# Altium PCB PCB2.PcbDoc
Units mm, origin at the board's own origin, x right, y up, seen from the top; angles counter-clockwise.
Board outline 152.4 x 101.6 mm, 2 copper layers (Top Layer, Bottom Layer); 112 components, 88 nets, 447 pads, 143 vias.
Unrouted connection lines stored in the file: 3.
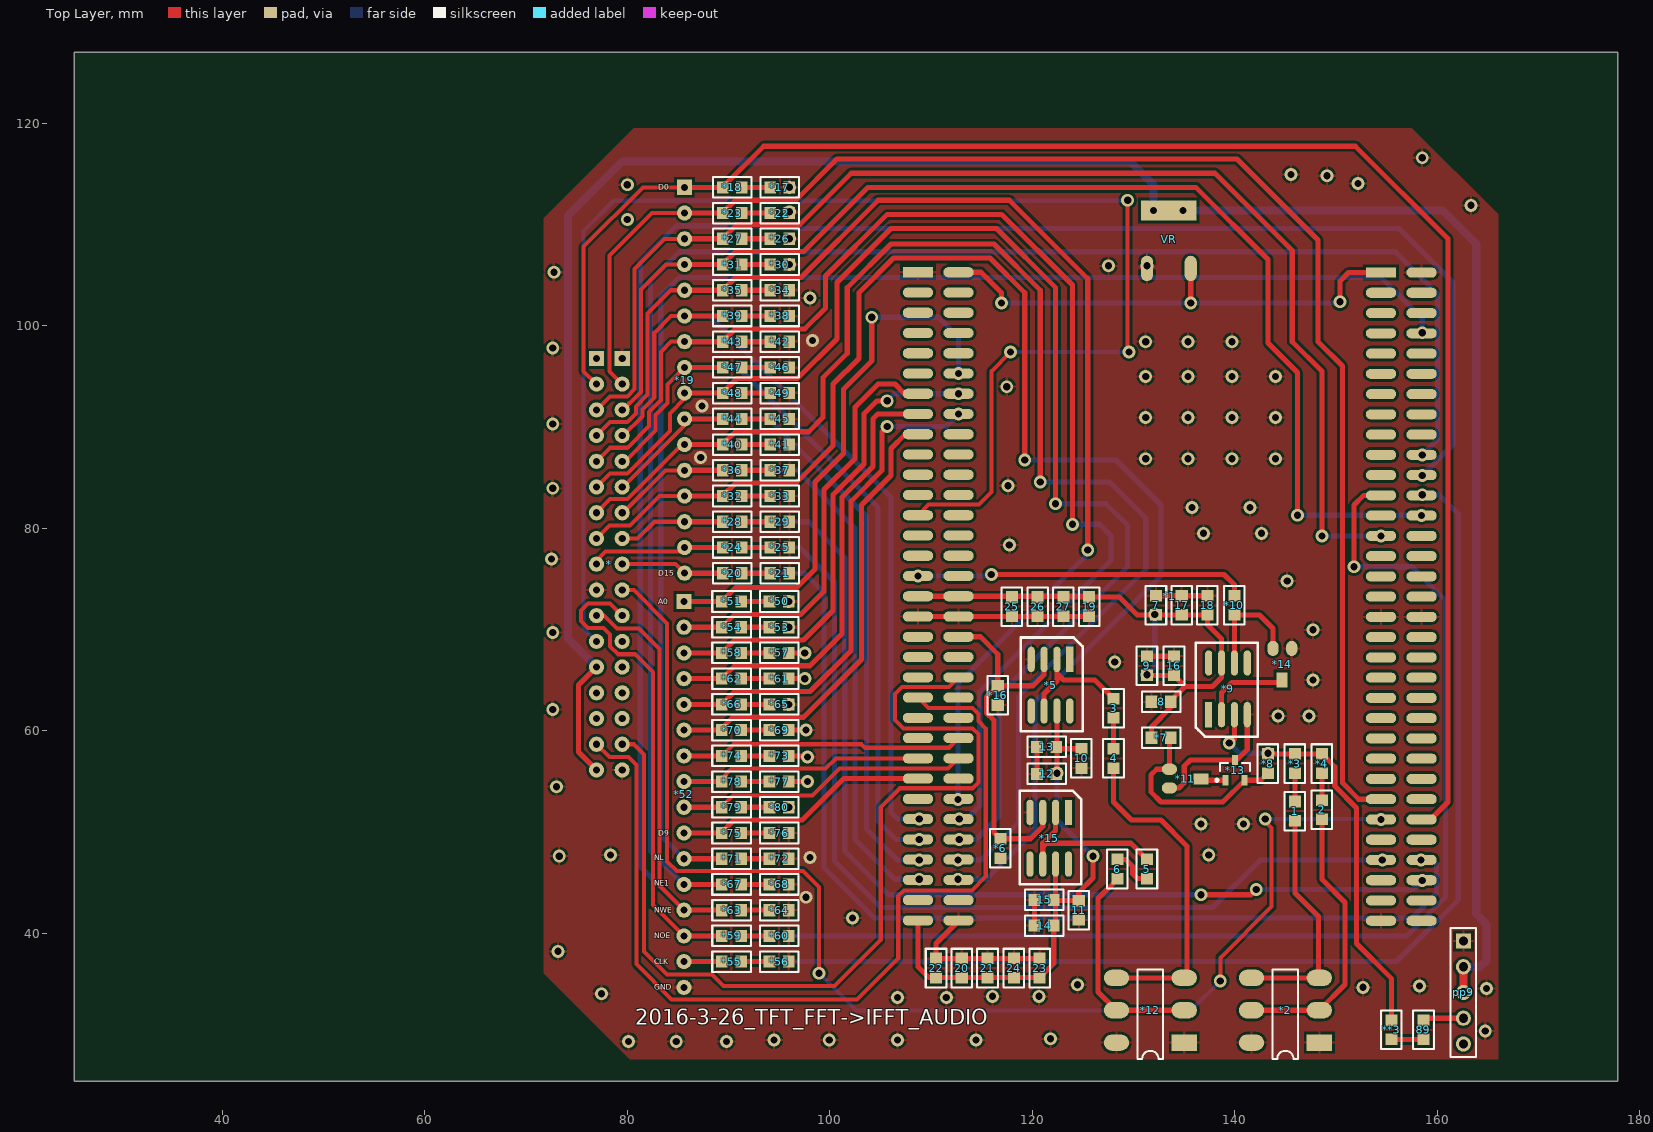
[diagram p0: Top Layer view]
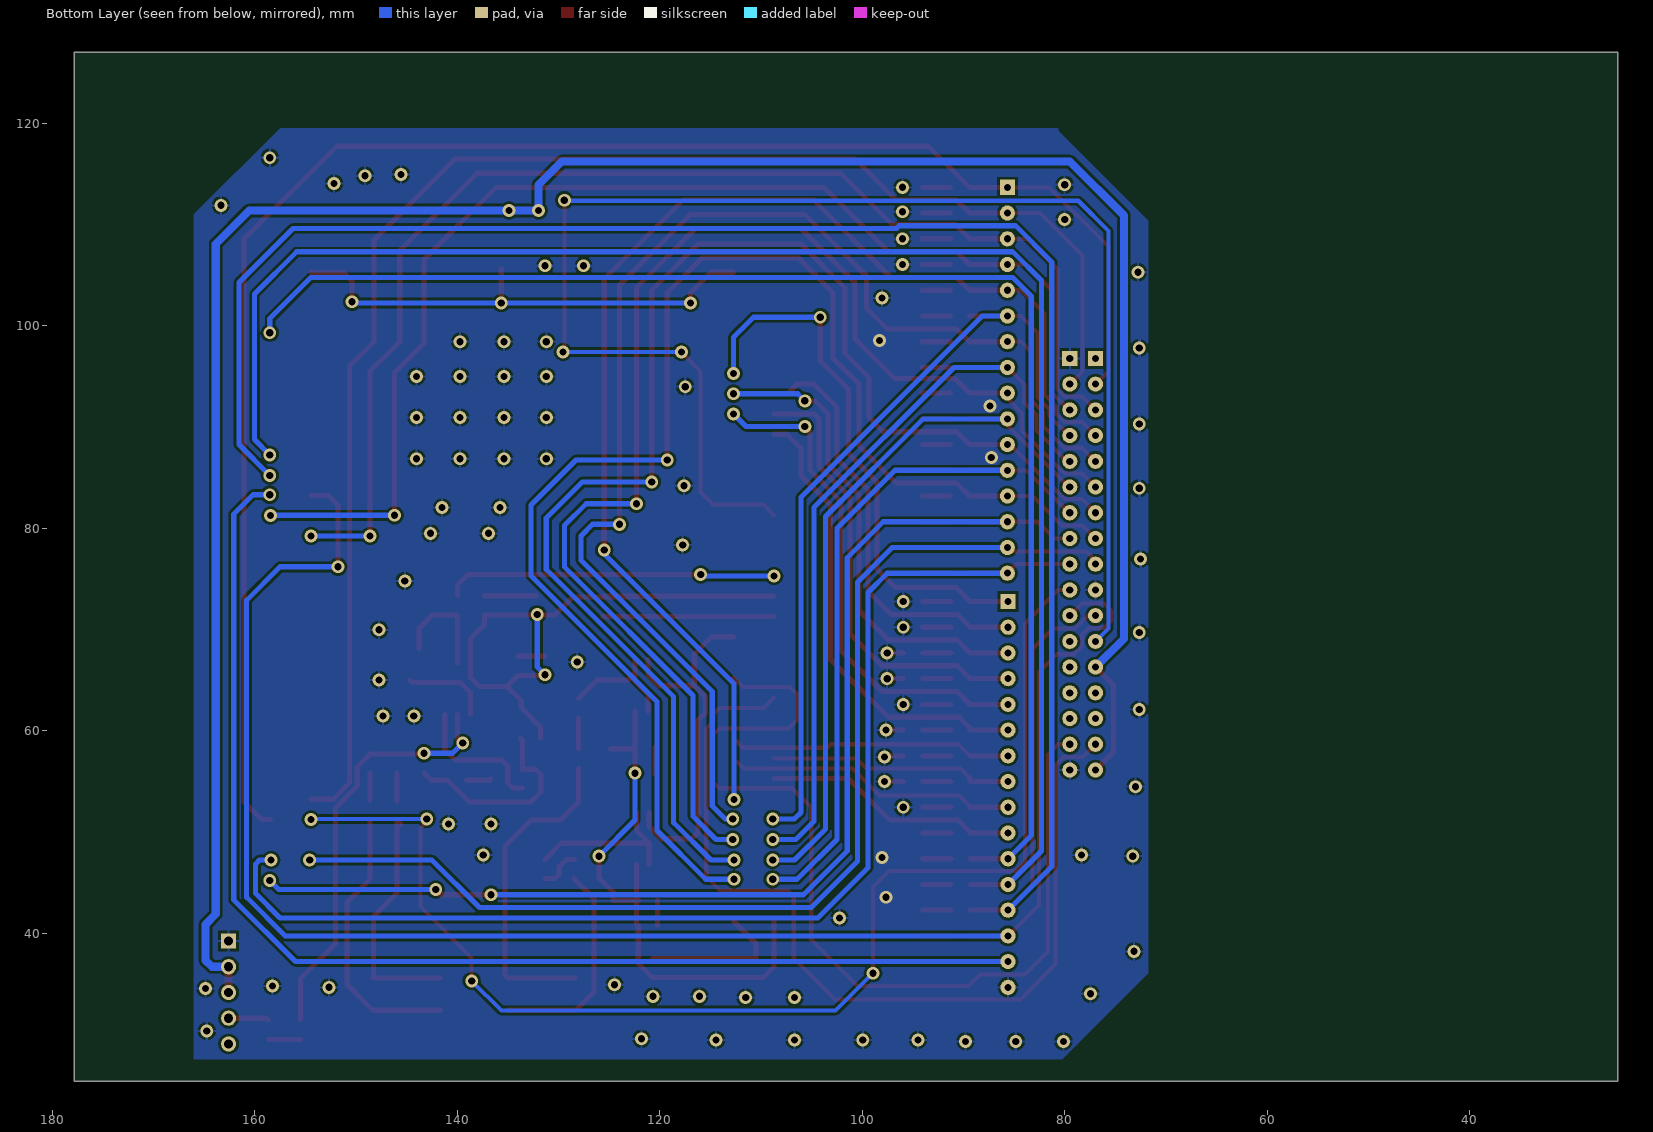
[diagram p1: Bottom Layer view, seen from below]

## Layer stack, top to bottom
Top Solder: solder mask 0.0102, Solder Resist, Dk 3.5
Top Layer: signal copper 0.0356
Dielectric 1: dielectric 0.32, FR-4, Dk 4.8
Bottom Layer: signal copper 0.0356
Bottom Solder: solder mask 0.0102, Solder Resist, Dk 3.5

## Board outline
25.4,25.4 177.8,25.4 177.8,127 25.4,127

## Design rules (kind name [scope] priority, off if disabled: settings)
Clearance [All] p1: gap=0.254
ComponentClearance [All] p1 off: gap=0.254 collisioncheckmode=3 verticalgap=0.254 showdistances=FALSE
PolygonConnect [All] p1: connectstyle=Relief reliefconductorwidth=0.254 reliefentries=4 polygonreliefangle="90 Angle" airgapwidth=0.254
RoutingVias [All] p1: holewidth=0.711 width=1.27 viastyle="Through Hole" minholewidth=0.711 minwidth=1.27 maxholewidth=0.711 maxwidth=1.27
SolderMaskExpansion [All] p1: expansion=0.102
Width [All] p1: maxlimit=0.8 minlimit=0.4 preferedwidth=0.8
29 further rules are at their usual default settings.

## Components (designator, comment, footprint, x,y, rotation, side; value= is the part's Value field where it differs from the comment)
1 "104" 104 145.923,52.07 r270 top
2 "104" 104 148.59,52.197 r270 top
3 "560Ohm" 104 128.016,62.23 r90 top
4 "104" 104 128.016,57.277 r270 top
5 "560Ohm" 104 131.318,46.355 r90 top
6 "104" 104 128.397,46.355 r270 top
7 "104" 104 132.207,72.39 r90 top
8 "104" 104 132.715,62.865 r180 top
9 "104" 104 131.318,66.421 r90 top
10 "104" 104 124.841,57.277 r270 top
11 "104" 104 124.587,42.291 r270 top
12 "104" 104 121.412,55.753 r180 top
13 "104" 104 121.412,58.42 r180 top
14 "104" 104 121.158,40.767 r180 top
15 "104" 104 121.158,43.307 r180 top
16 "104" 104 133.985,66.421 r90 top
17 "104" 104 134.747,72.39 r90 top
18 "104" 104 137.287,72.39 r90 top
19 "104" 104 125.603,72.263 r270 top
20 "104" 104 113.03,36.576 r90 top
21 "104" 104 115.57,36.576 r90 top
22 "104" 104 110.49,36.576 r90 top
23 "104" 104 120.716,36.576 r90 top
24 "104" 104 118.176,36.576 r90 top
25 "104" 104 117.983,72.263 r270 top
26 "104" 104 120.523,72.263 r270 top
27 "104" 104 123.063,72.263 r270 top
89 "104" 104 158.623,30.48 r90 top
* "Component_1" PCBComponent_1 76.962,76.454 r0 top
*1 "STM32F407ZET6" STM32F407ZET6 133.35,73.406 r0 top
*2 "PJ313E" PJ313E 148.336,29.21 r180 top
*3 "10kOhm" 104 145.923,56.769 r90 top
*4 "10kOhm" 104 148.59,56.769 r90 top
*5 "OPA333" OPA333 123.698,67.056 r270 top
*6 "10kOhm" 104 116.84,48.387 r90 top
*7 "1KOhm" 104 132.715,59.309 r0 top
*8 "10kOhm" 104 143.256,56.769 r90 top
*9 "OPA333" OPA333 137.414,61.595 r90 top
*10 "1KOhm" 104 139.954,72.39 r90 top
*11 "3x3_10KOhm" 3x3_10KOhm 133.604,55.245 r180 top
*12 "PJ313E" PJ313E 135.001,29.21 r180 top
*13 "TL432" AO3401 139.065,55.118 r90 top
*14 "3x3_10KOhm" 3x3_10KOhm 144.653,68.072 r90 top
*15 "OPA333" OPA333 123.571,51.943 r270 top
*16 "10kOhm" 104 116.586,63.5 r90 top
*17 "1KOhm" 104 95.062,113.665 r0 top
*18 "1KOhm" 104 90.363,113.665 r0 top
*19 "FSMC_A" DIP32 85.664,113.665 r0 top
*20 "1KOhm" 104 90.363,75.565 r0 top
*21 "1KOhm" 104 95.062,75.565 r0 top
*22 "1KOhm" 104 95.062,111.125 r0 top
*23 "1KOhm" 104 90.363,111.125 r0 top
*24 "1KOhm" 104 90.363,78.105 r0 top
*25 "1KOhm" 104 95.062,78.105 r0 top
*26 "1KOhm" 104 95.062,108.585 r0 top
*27 "1KOhm" 104 90.363,108.585 r0 top
*28 "1KOhm" 104 90.363,80.645 r0 top
*29 "1KOhm" 104 95.062,80.645 r0 top
*30 "1KOhm" 104 95.062,106.045 r0 top
*31 "1KOhm" 104 90.363,106.045 r0 top
*32 "1KOhm" 104 90.363,83.185 r0 top
*33 "1KOhm" 104 95.062,83.185 r0 top
*34 "1KOhm" 104 95.062,103.505 r0 top
*35 "1KOhm" 104 90.363,103.505 r0 top
*36 "1KOhm" 104 90.363,85.725 r0 top
*37 "1KOhm" 104 95.062,85.725 r0 top
*38 "1KOhm" 104 95.062,100.965 r0 top
*39 "1KOhm" 104 90.363,100.965 r0 top
*40 "1KOhm" 104 90.363,88.265 r0 top
*41 "1KOhm" 104 95.062,88.265 r0 top
*42 "1KOhm" 104 95.062,98.425 r0 top
*43 "1KOhm" 104 90.363,98.425 r0 top
*44 "1KOhm" 104 90.363,90.805 r0 top
*45 "1KOhm" 104 95.062,90.805 r0 top
*46 "1KOhm" 104 95.062,95.885 r0 top
*47 "1KOhm" 104 90.363,95.885 r0 top
*48 "1KOhm" 104 90.363,93.345 r0 top
*49 "1KOhm" 104 95.062,93.345 r0 top
*50 "1KOhm" 104 94.996,72.771 r0 top
*51 "1KOhm" 104 90.297,72.771 r0 top
*52 "FSMC_A" DIP32 85.598,72.771 r0 top
*53 "1KOhm" 104 94.996,70.231 r0 top
*54 "1KOhm" 104 90.297,70.231 r0 top
*55 "1KOhm" 104 90.297,37.211 r0 top
*56 "1KOhm" 104 94.996,37.211 r0 top
*57 "1KOhm" 104 94.996,67.691 r0 top
*58 "1KOhm" 104 90.297,67.691 r0 top
*59 "1KOhm" 104 90.297,39.751 r0 top
*60 "1KOhm" 104 94.996,39.751 r0 top
*61 "1KOhm" 104 94.996,65.151 r0 top
*62 "1KOhm" 104 90.297,65.151 r0 top
*63 "1KOhm" 104 90.297,42.291 r0 top
*64 "1KOhm" 104 94.996,42.291 r0 top
*65 "1KOhm" 104 94.996,62.611 r0 top
*66 "1KOhm" 104 90.297,62.611 r0 top
*67 "1KOhm" 104 90.297,44.831 r0 top
*68 "1KOhm" 104 94.996,44.831 r0 top
*69 "1KOhm" 104 94.996,60.071 r0 top
*70 "1KOhm" 104 90.297,60.071 r0 top
*71 "1KOhm" 104 90.297,47.371 r0 top
*72 "1KOhm" 104 94.996,47.371 r0 top
*73 "1KOhm" 104 94.996,57.531 r0 top
*74 "1KOhm" 104 90.297,57.531 r0 top
*75 "1KOhm" 104 90.297,49.911 r0 top
*76 "1KOhm" 104 94.996,49.911 r0 top
*77 "1KOhm" 104 94.996,54.991 r0 top
*78 "1KOhm" 104 90.297,54.991 r0 top
*79 "1KOhm" 104 90.297,52.451 r0 top
*80 "1KOhm" 104 94.996,52.451 r0 top
**3 "10kOhm" 104 155.448,30.48 r270 top
pp9 "Header 5" HDR1X5 162.56,39.243 r270 top
VR "Volt Reg" TO252 133.477,111.379 r0 top

## Footprints (in the part's own frame and the unit in brackets; to place one, negate y for a bottom-side part, rotate by r counter-clockwise, add the part's x,y. Pads: shape width x height; smd on the part's side, far side on the other; paste and mask are expansions set on the pad)
3x3_10KOhm [mm]
  oval 1.5x1.1 smd: 1(0.071,0.889) 3(0.071,-0.961)
  rect 1.5x1.1 smd: 2(-3.048,0)
104 [mm]
  rect 1.14x1.2 smd: 1(-0.95,0) 2(0.95,0)
  silkscreen extent -1.91,-1.02 1.91,1.02
AO3401 [mm]
  rect 1x0.6 smd: 1(2,-0.95) 2(0,0) 3(0,-1.9)
  silkscreen extent -0.12,-2.45 1.7,0.97
DIP32 [mm]
  rect 1.5x1.5 hole 0.7: 1(0,0)
  round 1.5 hole 0.7: 2(0,-2.54) 3(0,-5.08) 4(0,-7.62) 5(0,-10.16) 6(0,-12.7) 7(0,-15.24) 8(0,-17.78) 9(0,-20.32) 10(0,-22.86) 11(0,-25.4) 12(0,-27.94) 13(0,-30.48) 14(0,-33.02) 15(0,-35.56) 16(0,-38.1)
HDR1X5 [mm] "Connector; Header; 5 Position"
  rect 1.5x1.5 hole 0.9: 1(0,0)
  round 1.5 hole 0.9: 2(2.54,0) 3(5.08,0) 4(7.62,0) 5(10.16,0)
  silkscreen extent -1.27,-1.27 11.43,1.27
OPA333 [mm]
  rect 2.5x0.7 smd: 1(0,0)
  oval 2.5x0.7 smd: 2(0,-1.27) 3(0,-2.54) 4(0,-3.81) 5(5.1,-3.81) 6(5.1,-2.54) 7(5.1,-1.27) 8(5.1,0)
  silkscreen extent -2.16,-4.83 7.11,1.27
PCBComponent_1 [mm]
  rect 1.5x1.5 hole 0.7: 1(0,20.32) 34(2.54,20.32)
  round 1.5 hole 0.7: 2(0,17.78) 3(0,15.24) 4(0,12.7) 5(0,10.16) 6(0,7.62) 7(0,5.08) 8(0,2.54) 9(0,0) 10(0,-2.54) 11(0,-5.08) 12(0,-7.62) 13(0,-10.16) 14(0,-12.7) 15(0,-15.24) 16(0,-17.78) 17(0,-20.32) 18(2.54,-20.32) 19(2.54,-17.78) 20(2.54,-15.24) 21(2.54,-12.7) 22(2.54,-10.16) 23(2.54,-7.62) 24(2.54,-5.08) 25(2.54,-2.54) 26(2.54,0) 27(2.54,2.54) 28(2.54,5.08) 29(2.54,7.62) 30(2.54,10.16) 31(2.54,12.7) 32(2.54,15.24) 33(2.54,17.78)
PJ313E [mm]
  rect 2.5x1.6 smd: 1(0,0)
  oval 2.5x1.6 smd: 1(6.7,0) 2(0,-3.2) 2(6.7,-3.2) 3(0,-6.4) 3(6.7,-6.4)
  silkscreen extent 2.08,-7.24 4.61,1.6
STM32F407ZET6 [mm]
  rect 3x1 smd: 1(-24.638,31.877) 67(21.082,31.845)
  oval 3x1 smd: 2(-24.638,29.877) 3(-24.638,27.877) 4(-24.638,25.877) 5(-24.638,23.877) 6(-24.638,21.877) 7(-24.638,19.877) 8(-24.638,17.877) 9(-24.638,15.877) 10(-24.638,13.877) 11(-24.638,11.877) 12(-24.638,9.877) 13(-24.638,7.877) 14(-24.638,5.877) 15(-24.638,3.877) 16(-24.638,1.877) 17(-24.638,-0.123) 18(-24.638,-2.123) 19(-24.638,-4.123) 20(-24.638,-6.123) 21(-24.638,-8.123) 22(-24.638,-10.123) 23(-24.638,-12.123) 24(-24.638,-14.123) 25(-24.638,-16.123) 26(-24.638,-18.123) 27(-24.638,-20.123) 28(-24.638,-22.123) 29(-24.638,-24.123) 30(-24.638,-26.123) 31(-24.638,-28.123) 32(-24.638,-30.123) 33(-24.638,-32.123) 34(-20.638,-32.123) 35(-20.638,-30.123) 36(-20.638,-28.123) 37(-20.638,-26.123) 38(-20.638,-24.123) 39(-20.638,-22.123) 40(-20.638,-20.123) 41(-20.638,-18.123) 42(-20.638,-16.123) 43(-20.638,-14.123) 44(-20.638,-12.123) 45(-20.638,-10.123) 46(-20.638,-8.123) 47(-20.638,-6.123) 48(-20.638,-4.123) 49(-20.638,-2.123) 50(-20.638,-0.123) 51(-20.638,1.877) 52(-20.638,3.877) 53(-20.638,5.877) 54(-20.638,7.877) 55(-20.638,9.877) 56(-20.638,11.877) 57(-20.638,13.877) 58(-20.638,15.877) 59(-20.638,17.877) 60(-20.638,19.877) 61(-20.638,21.877) 62(-20.638,23.877) 63(-20.638,25.877) 64(-20.638,27.877) 65(-20.638,29.877) 66(-20.638,31.877) 68(21.082,29.845) 69(21.082,27.845) 70(21.082,25.845) 71(21.082,23.845) 72(21.082,21.845) 73(21.082,19.845) 74(21.082,17.845) 75(21.082,15.845) 76(21.082,13.845) 77(21.082,11.845) 78(21.082,9.845) 79(21.082,7.845) 80(21.082,5.845) 81(21.082,3.845) 82(21.082,1.845) 83(21.082,-0.155) 84(21.082,-2.155) 85(21.082,-4.155) 86(21.082,-6.155) 87(21.082,-8.155) 88(21.082,-10.155) 89(21.082,-12.155) 90(21.082,-14.155) 91(21.082,-16.155) 92(21.082,-18.155) 93(21.082,-20.155) 94(21.082,-22.155) 95(21.082,-24.155) 96(21.082,-26.155) 97(21.082,-28.155) 98(21.082,-30.155) 99(21.082,-32.155) 100(25.082,-32.155) 101(25.082,-30.155) 102(25.082,-28.155) 103(25.082,-26.155) 104(25.082,-24.155) 105(25.082,-22.155) 106(25.082,-20.155) 107(25.082,-18.155) 108(25.082,-16.155) 109(25.082,-14.155) 110(25.082,-12.155) 111(25.082,-10.155) 112(25.082,-8.155) 113(25.082,-6.155) 114(25.082,-4.155) 115(25.082,-2.155) 116(25.082,-0.155) 117(25.082,1.845) 118(25.082,3.845) 119(25.082,5.845) 120(25.082,7.845) 121(25.082,9.845) 122(25.082,11.845) 123(25.082,13.845) 124(25.082,15.845) 125(25.082,17.845) 126(25.082,19.845) 127(25.082,21.845) 128(25.082,23.845) 129(25.082,25.845) 130(25.082,27.845) 131(25.082,29.845) 132(25.082,31.845)
TO252 [mm]
  rect 5.5x2 smd: 1(0,0)
  oval 1.2x2.5 smd: 2(-2.159,-5.715) 3(2.159,-5.715)

## Part data
pp9: "Header, 5-Pin"
VR: "Voltage Regulator"

## Via types
v1: diameter 1.27, hole 0.711, Top Layer to Bottom Layer, 143 vias

## Nets (pads, with @x,y where several pads share a name; then routed paths per layer and width w, separated by ;. In a path a pad name is that pad's centre, name@x,y a point inside that pad or via, vN(x,y) a via of type N, cw(c..) or ccw(c..) an arc to the next point about the centre after c; other vN are vias at no path point)
FSMC_A0: *1.61 *51.1 *52.1 | length 54.4
  Top Layer w0.508: *52.1 *51.1 90.744,74.168 96.774,74.168 98.552,75.946 98.552,84.582 101.346,87.376 101.346,93.726 104.14,96.52 v1(104.14,100.838)
  Bottom Layer w0.508: v1(104.14,100.838) 110.744,100.838 112.712,98.87 v1(112.712,95.283)
FSMC_A1: *1.7 *52.2 *54.1 | length 41
  Top Layer w0.508: *52.2 *54.1 90.617,71.501 97.155,71.501 99.441,73.787 99.441,83.82 102.489,86.868 102.489,91.948 104.775,94.234 106.426,94.234 *1.7@107.377,93.283
FSMC_A2: *1.60 *52.3 *58.1 | length 47.3
  Top Layer w0.508: *52.3 *58.1 90.617,68.961 97.409,68.961 100.33,71.882 100.33,83.312 103.378,86.36 103.378,91.313 104.648,92.583 v1(105.664,92.583)
  Bottom Layer w0.508: v1(105.664,92.583) 106.364,93.283 v1(112.712,93.283)
FSMC_A3: *1.8 *52.4 *62.1 | length 44.6
  Top Layer w0.508: *52.4 *62.1 90.617,66.421 98.044,66.421 101.219,69.596 101.219,83.058 104.267,86.106 104.267,90.805 104.745,91.283 *1.8
FSMC_A4: *1.59 *52.5 *66.1 | length 49.9
  Top Layer w0.508: *52.5 *66.1 90.617,63.881 98.044,63.881 102.108,67.945 102.108,82.677 105.156,85.725 105.156,89.535 v1(105.664,90.043)
  Bottom Layer w0.508: v1(105.664,90.043) 111.472,90.043 v1(112.712,91.283)
FSMC_A5: *1.9 *52.6 *70.1 | length 45.8
  Top Layer w0.508: *52.6 *70.1 89.347,60.264 90.424,61.341 97.409,61.341 103.124,67.056 103.124,82.296 106.045,85.217 106.045,87.884 107.444,89.283 *1.9
FSMC_A6: *1.43 *52.7 *74.1 | length 28.1
  Top Layer w0.4: *74.1 90.49,58.674 103.124,58.674 103.469,58.329 111.758,58.329 *1.43
  Top Layer w0.508: *52.7 *74.1
FSMC_A7: *1.25 *52.8 *78.1 | length 24.3
  Top Layer w0.4: *78.1@89.347,55.311 90.297,56.261 99.568,56.261 100.59,57.283 *1.25
  Top Layer w0.508: *52.8 *78.1 *78.1@89.347,55.311
FSMC_A8: *1.42 *52.9 *79.1 | length 29.2
  Top Layer w0.4: *79.1@89.347,52.517 90.424,53.594 98.298,53.594 100.965,56.261 111.69,56.261 *1.42
  Top Layer w0.508: *52.9 *79.1 *79.1@89.347,52.517
FSMC_A9: *1.26 *52.10 *75.1 | length 25.4
  Top Layer w0.508: *52.10 *75.1 89.347,49.977 90.551,51.181 97.282,51.181 101.384,55.283 *1.26
FSMC_CLK: *1.121 *52.15 *55.1 | length 125.2
  Top Layer w0.508: *52.15 *55.1
  Bottom Layer w0.508: *52.15 155.956,37.211 162.052,43.307 162.052,81.407 160.147,83.312 v1(158.496,83.312)
FSMC_D0: *1.105 *18.1 *19.1 *.2 | length 166.3
  Top Layer w0.4: *.2 75.692,95.504 75.692,107.823 81.534,113.665 *19.1
  Top Layer w0.508: *19.1 *18.1 93.477,117.729 151.892,117.729 161.036,108.585 161.036,52.959 159.328,51.251 *1.105
FSMC_D1: *1.93 *19.2 *23.1 *.33 | length 149.5
  Top Layer w0.4: *.33 78.232,95.504 78.232,106.934 82.423,111.125 *19.2
  Top Layer w0.508: *19.2 *23.1 90.683,112.395 96.63,112.395 100.694,116.459 140.208,116.459 148.209,108.458 148.209,98.425 150.622,96.012 150.622,54.864 152.235,53.251 *1.93
FSMC_D2: *1.80 *19.3 *27.1 *.3 | length 123.7
  Top Layer w0.4: *.3 78.298,93.03 80.001,93.03 80.706,93.735 80.706,105.598 83.693,108.585 *19.3
  Top Layer w0.508: *19.3 *27.1 90.81,109.982 97.028,109.982 102.108,115.062 138.049,115.062 145.669,107.442 145.669,98.425 148.59,95.504 v1(148.59,79.248)
  Bottom Layer w0.508: v1(148.59,79.248) 154.429,79.248 v1(154.432,79.251)
FSMC_D3: *1.120 *19.4 *31.1 *.32 | length 120.5
  Top Layer w0.4: *.32 79.59,91.694 80.188,92.292 80.188,92.376 80.272,92.376 81.36,93.464 81.36,103.585 83.82,106.045 *19.4
  Top Layer w0.508: *19.4 *31.1 90.683,107.315 97.409,107.315 103.759,113.665 136.144,113.665 143.256,106.553 143.256,98.298 146.177,95.377 v1(146.177,81.28)
  Bottom Layer w0.508: v1(146.177,81.28) 158.403,81.28 v1(158.432,81.251)
FSMC_D4: *1.40 *19.5 *35.1 *.4 | length 123.2
  Top Layer w0.4: *.4 78.298,90.49 80.001,90.49 80.842,91.331 80.842,92.022 82.014,93.194 82.014,101.191 84.328,103.505 *19.5
  Top Layer w0.508: *19.5 *35.1 90.683,104.775 97.155,104.775 104.775,112.395 117.729,112.395 125.476,104.648 v1(125.476,77.851)
  Bottom Layer w0.508: v1(112.649,53.213) 112.649,64.643 125.476,77.47 v1(125.476,77.851)
FSMC_D5: *1.28 *19.6 *39.1 *.31 | length 80.9
  Top Layer w0.4: *.31 79.59,89.154 81.496,91.06 81.496,91.751 82.668,92.923 82.668,99.305 84.328,100.965 *19.6
  Top Layer w0.508: *19.6 *39.1
  Bottom Layer w0.508: *19.6 88.138,100.965 106.045,83.058 106.045,51.943 106.68,51.308 v1(108.839,51.308)
FSMC_D6: *1.39 *19.7 *43.1 *.5 | length 127.9
  Top Layer w0.4: *.5 78.298,87.95 80.001,87.95 82.15,90.099 82.15,91.48 83.322,92.652 83.322,97.419 84.328,98.425 *19.7
  Top Layer w0.508: *19.7 *43.1 90.683,99.695 97.536,99.695 99.568,101.727 99.568,104.902 105.664,110.998 116.967,110.998 123.952,104.013 v1(123.952,80.391)
  Bottom Layer w0.508: v1(112.776,51.308) 113.538,51.308 114.808,52.578 114.808,63.881 127.762,76.835 127.762,79.248 126.619,80.391 v1(123.952,80.391)
FSMC_D7: *1.29 *19.8 *47.1 *.30 | length 76.4
  Top Layer w0.4: *.30 79.756,86.614 82.804,89.662 82.804,91.209 83.976,92.381 83.976,94.197 *19.8
  Top Layer w0.508: *19.8 *47.1
  Bottom Layer w0.508: *19.8 90.932,95.885 104.775,82.042 104.775,51.054 106.553,49.276 v1(108.839,49.276)
FSMC_D8: *1.38 *19.9 *48.1 *.6 | length 131.1
  Top Layer w0.4: *.6 78.298,85.41 80.001,85.41 84.201,89.61 84.201,91.336 85.664,92.799 *19.9
  Top Layer w0.508: *19.9 *48.1 90.845,94.777 96.792,94.777 100.711,98.696 100.711,104.267 106.045,109.601 116.459,109.601 122.301,103.759 v1(122.301,82.423)
  Bottom Layer w0.508: v1(112.776,49.276) 114.427,49.276 116.713,51.562 116.713,63.5 129.413,76.2 129.413,80.264 127.254,82.423 v1(122.301,82.423)
FSMC_D9: *1.30 *19.10 *44.1 *.29 | length 72.4
  Top Layer w0.4: *.29 79.59,84.074 85.664,90.148 *19.10
  Top Layer w0.508: *19.10 *44.1
  Bottom Layer w0.508: *19.10 93.98,90.805 103.632,81.153 103.632,50.292 106.68,47.244 v1(108.839,47.244)
FSMC_D10: *1.37 *19.11 *40.1 *.7 | length 136.4
  Top Layer w0.4: *.7 78.298,82.87 80.001,82.87 85.396,88.265 *19.11
  Top Layer w0.508: *19.11 *40.1 90.683,89.535 97.917,89.535 99.314,90.932 99.314,94.869 101.727,97.282 101.727,103.759 106.045,108.077 116.205,108.077 120.777,103.505 v1(120.777,84.582)
  Bottom Layer w0.508: v1(112.649,47.244) 114.935,47.244 118.618,50.927 118.618,63.373 131.191,75.946 131.191,81.026 127.635,84.582 v1(120.777,84.582)
FSMC_D11: *1.31 *19.12 *36.1 *.28 | length 69.6
  Top Layer w0.4: *.28 79.59,81.534 83.781,85.725 *19.12
  Top Layer w0.508: *19.12 *36.1
  Bottom Layer w0.508: *19.12 96.774,85.725 102.489,80.01 102.489,49.276 106.426,45.339 v1(108.839,45.339)
FSMC_D12: *1.36 *19.13 *32.1 *.8 | length 141.3
  Top Layer w0.4: *.8 78.232,80.264 80.264,80.264 83.185,83.185 *19.13
  Top Layer w0.508: *19.13 *32.1 90.683,84.455 96.63,84.455 100.33,88.155 100.33,94.234 102.87,96.774 102.87,103.251 106.299,106.68 115.824,106.68 119.253,103.251 v1(119.253,86.741)
  Bottom Layer w0.508: v1(112.649,45.339) 115.443,45.339 120.269,50.165 120.269,62.865 132.715,75.311 132.715,82.296 128.27,86.741 v1(119.253,86.741)
FSMC_D13: *1.102 *19.14 *28.1 *.27 | length 116.3
  Top Layer w0.4: *.27 81.026,78.994 82.677,80.645 *19.14
  Top Layer w0.508: *19.14 *28.1 ; v1(136.652,43.815) 141.605,43.815 v1(142.113,44.323)
  Bottom Layer w0.508: *19.14@85.598,80.645 *19.14 97.917,80.645 101.473,77.089 101.473,48.133 105.791,43.815 v1(136.652,43.815) ; v1(142.113,44.323) 157.607,44.323 v1(158.496,45.212)
FSMC_D14: *1.96 *19.15 *24.1 *.9 | length 115.1
  Top Layer w0.4: *.9 76.962,76.835 77.851,77.724 85.283,77.724 *19.15
  Top Layer w0.508: *19.15 *24.1
  Bottom Layer w0.508: *19.15 97.028,78.105 100.457,74.676 100.457,47.117 105.029,42.545 137.795,42.545 142.494,47.244 v1(154.559,47.244)
FSMC_D15: *1.103 *19.16 *20.1 *.26 | length 120.1
  Top Layer w0.4: *.26 84.775,76.454 *19.16
  Top Layer w0.508: *19.16 *20.1
  Bottom Layer w0.508: *19.16 97.536,75.565 99.441,73.66 99.441,46.482 104.394,41.529 157.48,41.529 159.893,43.942 159.893,46.863 159.512,47.244 v1(158.369,47.244)
FSMC_NE1: *1.123 *52.12 *67.1 | length 161.9
  Top Layer w0.508: *52.12 *67.1
  Bottom Layer w0.508: *52.12 82.296,48.133 82.296,104.456 85.143,107.303 155.841,107.303 160.02,103.124 160.02,88.773 v1(158.496,87.249)
FSMC_NL: *1.129 *52.11 *71.1 | length 139.3
  Top Layer w0.508: *52.11 *71.1
  Bottom Layer w0.508: *52.11 83.312,49.657 83.312,102.932 85.143,104.763 154.444,104.763 158.496,100.711 v1(158.496,99.314)
FSMC_NOE: *1.78 *52.14 *59.1 *.24 | length 172.5
  Top Layer w0.4: *.24 78.298,72.578 76.134,72.578 75.438,71.882 75.438,70.866 76.134,70.17 77.658,70.17 78.298,69.53 78.298,68.335 79.069,67.564 80.753,67.564 82.531,65.786 82.531,42.818 *52.14
  Top Layer w0.508: *52.14 *59.1 ; v1(151.765,76.2) 151.765,82.296 152.72,83.251 *1.78
  Bottom Layer w0.508: *52.14 156.972,39.751 160.782,43.561 160.782,72.898 157.48,76.2 v1(151.765,76.2)
FSMC_NWE: *1.122 *52.13 *63.1 *.11 | length 208.3
  Top Layer w0.4: *.11 77.724,71.374 78.994,70.104 81.153,70.104 83.185,68.072 83.185,44.704 *52.13
  Top Layer w0.508: *52.13 *63.1
  Bottom Layer w0.508: *52.13 81.28,46.609 81.28,106.299 84.848,109.867 96.346,109.867 96.612,109.601 156.21,109.601 161.544,104.267 161.544,88.265 v1(158.496,85.217)
GND: 7.2 8.2 9.2 10.2 11.2 12.2 13.2 14.2 15.2 16.2 17.2 18.2 19.2 20.2 21.2 22.2 23.2 24.2 25.2 26.2 27.2 *1.1 *1.18 *1.34 *1.49 *1.84 *1.99 *1.115 *1.132 *2.1 *5.4 *6.1 *9.4 *11.1 *12.1 *13.1 *14.3 *15.4 *16.1 *17.2 *21.2 *22.2 *25.2 *26.2 *29.2 *30.2 *33.2 *34.2 *37.2 *38.2 *41.2 *42.2 *45.2 *46.2 *49.2 *50.2 *52.16 *53.2 *56.2 *57.2 *60.2 *61.2 *64.2 *65.2 *68.2 *69.2 *72.2 *73.2 *76.2 *77.2 *80.2 *.10 *.18 *.34 pp9.1 VR.2 | length 67.3
  Top Layer w0.508: *77.2 v1(97.79,54.991) ; *73.2 97.663,57.531 v1(97.79,57.404) ; *69.2 v1(97.663,60.071) ; *61.2 v1(97.536,65.151) ; *57.2 v1(97.536,67.691) ; *1.18 *1.49 125.573,71.283 19.2 ; *1.34 112.712,41.211 110.49,38.989 22.2 20.2@112.776,37.526 ; 20.2 20.2@112.776,37.526 ; 14.2 15.2 ; 12.2 13.2 ; 23.2 20.2@112.776,37.526 ; 9.2 16.2 ; 7.2 17.2 18.2 ; *11.1 134.493,54.356 135.001,54.864 135.001,56.515 135.604,57.118 *13.1 140.176,57.118 141.224,58.166 *9.4
  other v1: 80.137,29.337 84.836,29.337 89.789,29.337 94.488,29.464 99.949,29.464 106.68,29.464 114.427,29.464 121.793,29.591 164.719,30.353 106.68,33.655 111.506,33.655 116.078,33.782 120.65,33.782 77.47,34.036 164.846,34.544 152.654,34.671 158.242,34.798 124.46,34.925 73.152,38.227 102.235,41.529 97.663,43.561 98.044,47.498 73.279,47.625 78.359,47.752 137.414,47.752 136.652,50.8 140.843,50.8 95.946,52.451 73.025,54.483 144.272,61.468 147.32,61.468 72.644,62.103 95.946,62.611 147.701,65.024 128.143,66.802 72.644,69.723 147.701,69.977 95.946,70.231 95.946,72.771 145.161,74.803 72.517,76.962 117.729,78.359 136.906,79.502 142.621,79.502 135.763,82.042 141.478,82.042 72.644,83.947 117.602,84.201 131.191,86.868 135.382,86.868 139.7,86.868 144.018,86.868 87.249,86.995 72.644,90.297 131.191,90.932 135.382,90.932 139.7,90.932 144.018,90.932 87.376,92.075 117.475,93.98 131.191,94.996 135.382,94.996 139.7,94.996 144.018,94.996 72.644,97.79 131.191,98.425 135.382,98.425 139.7,98.425 98.298,98.552 98.044,102.743 72.771,105.283 127.508,105.918 131.318,105.918 96.012,106.045 96.012,108.585 80.01,110.49 96.012,111.252 163.322,111.887 96.012,113.665 80.01,113.919 152.146,114.046 149.098,114.808 145.542,114.935 158.496,116.586
Net3_1: 3.1 4.1 | length 3.1
  Top Layer w0.508: 4.1 3.1
Net5_1: 5.1 6.1 | length 4.2
  Top Layer w0.508: 6.1 129.225,47.305 129.921,46.609 129.921,45.847 130.363,45.405 5.1
Net89_2: 89.2 pp9.4 | length 4
  Top Layer w0.508: 89.2 158.816,31.623 pp9.4
Net*2_2: 2.2 *2.2 | length 27.5
  Top Layer w0.508: *2.2@141.636,32.41 148.336,32.41 150.876,34.95 150.876,43.053 148.59,45.339 2.2
Net*2_3: 1.2 *2.3 | length 23.7
  Top Layer w0.508: *2.3@141.636,35.61 148.336,35.61 148.259,35.687 148.259,41.656 145.923,43.992 1.2 1.2@145.551,50.748
Net*3_1: 1.1 *3.1 | length 2.8
  Top Layer w0.508: 1.1 *3.1
Net*3_2: *3.2 *4.2 *8.2 *9.3 **3.1 | length 41.5
  Top Layer w0.508: v1@139.7,58.928 139.954,59.182 *9.3 ; *8.2 *3.2 *4.2 149.86,56.449 149.86,54.548 152.019,52.389 152.019,38.989 155.448,35.56 **3.1
  Bottom Layer w0.508: v1(139.446,58.801) 140.462,57.785 v1(143.256,57.785)
Net*4_1: 2.1 *4.1 | length 2.7
  Top Layer w0.508: 2.1 *4.1
Net*5_2: 3.2 *5.2 *5.6 | length 12.2
  Top Layer w0.508: *5.6 121.158,63.627 122.428,64.897 122.428,65.659 ; *5.2 122.428,65.659 ; 3.2 126.172,65.024 123.063,65.024 122.428,65.659
Net*7_2: *7.2 *8.1 *11.3 *13.3 | length 20
  Top Layer w0.508: *7.2@133.731,59.248 133.533,59.05 *11.3 132.279,56.206 131.699,55.626 131.699,53.975 132.715,52.959 138.806,52.959 *13.3 142.555,55.118 *8.1
Net*9_2: *9.2 *14.2 | length 8.7
  Top Layer w0.508: *9.2 138.684,63.754 139.7,64.77 144.399,64.77 *14.2
Net*9_6: *9.6 *10.1 *14.1 | length 11.1
  Top Layer w0.508: *9.6 *10.1 142.428,71.44 143.764,70.104 *14.1
Net*11_2: *11.2 *13.2 | length 2.5
  Top Layer w0.508: *11.2 136.779,55.118 *13.2
Net*12_2: 6.2 *12.2 | length 21.2
  Top Layer w0.508: 6.2 128.397,45.339 126.492,43.434 126.492,34.219 128.301,32.41 *12.2@135.001,32.41
Net*12_3: 4.2 *12.3 | length 32.2
  Top Layer w0.508: 4.2 128.016,52.959 129.794,51.181 132.715,51.181 135.255,48.641 135.255,35.864 135.001,35.61 *12.3@128.301,35.61
Net*15_2: 5.2 *15.2 *15.6 | length 16.7
  Top Layer w0.508: *15.6 121.031,48.514 ; *15.2 122.301,50.165 121.031,48.895 121.031,48.514 ; 5.2 129.728,48.895 121.412,48.895 121.031,48.514
Net*17_1: *17.1 *18.2 | length 2.8
  Top Layer w0.508: *18.2 *17.1
Net*20_2: *20.2 *21.1 | length 2.8
  Top Layer w0.508: *20.2 *21.1
Net*22_1: *22.1 *23.2 | length 2.8
  Top Layer w0.508: *23.2 *22.1
Net*24_2: *24.2 *25.1 | length 2.8
  Top Layer w0.508: *24.2 *25.1
Net*26_1: *26.1 *27.2 | length 2.8
  Top Layer w0.508: *27.2 *26.1
Net*28_2: *28.2 *29.1 | length 2.8
  Top Layer w0.508: *28.2 *29.1
Net*30_1: *30.1 *31.2 | length 2.8
  Top Layer w0.508: *31.2 *30.1
Net*32_2: *32.2 *33.1 | length 2.8
  Top Layer w0.508: *32.2 *33.1
Net*34_1: *34.1 *35.2 | length 2.8
  Top Layer w0.508: *35.2 *34.1
Net*36_2: *36.2 *37.1 | length 2.8
  Top Layer w0.508: *36.2 *37.1
Net*38_1: *38.1 *39.2 | length 2.8
  Top Layer w0.508: *39.2 *38.1
Net*40_2: *40.2 *41.1 | length 2.8
  Top Layer w0.508: *40.2 *41.1
Net*42_1: *42.1 *43.2 | length 2.8
  Top Layer w0.508: *43.2 *42.1
Net*44_2: *44.2 *45.1 | length 2.8
  Top Layer w0.508: *44.2 *45.1
Net*46_1: *46.1 *47.2 | length 2.8
  Top Layer w0.508: *47.2 *46.1
Net*48_2: *48.2 *49.1 | length 2.8
  Top Layer w0.508: *48.2 *49.1
Net*50_1: *50.1 *51.2 | length 2.8
  Top Layer w0.508: *51.2 *50.1
Net*53_1: *53.1 *54.2 | length 2.8
  Top Layer w0.508: *54.2 *53.1
Net*55_2: *55.2 *56.1 | length 2.8
  Top Layer w0.508: *55.2 *56.1
Net*57_1: *57.1 *58.2 | length 2.8
  Top Layer w0.508: *58.2 *57.1
Net*59_2: *59.2 *60.1 | length 2.8
  Top Layer w0.508: *59.2 *60.1
Net*61_1: *61.1 *62.2 | length 2.8
  Top Layer w0.508: *62.2 *61.1
Net*63_2: *63.2 *64.1 | length 2.8
  Top Layer w0.508: *63.2 *64.1
Net*65_1: *65.1 *66.2 | length 2.8
  Top Layer w0.508: *66.2 *65.1
Net*67_2: *67.2 *68.1 | length 2.8
  Top Layer w0.508: *67.2 *68.1
Net*69_1: *69.1 *70.2 | length 2.8
  Top Layer w0.508: *70.2 *69.1
Net*71_2: *71.2 *72.1 | length 2.8
  Top Layer w0.508: *71.2 *72.1
Net*73_1: *73.1 *74.2 | length 2.8
  Top Layer w0.508: *74.2 *73.1
Net*75_2: *75.2 *76.1 | length 2.8
  Top Layer w0.508: *75.2 *76.1
Net*77_1: *77.1 *78.2 | length 2.8
  Top Layer w0.508: *78.2 *77.1
Net*79_2: *79.2 *80.1 | length 2.8
  Top Layer w0.508: *79.2 *80.1
Net**3_2: 89.1 **3.2 | length 3.2
  Top Layer w0.508: **3.2 89.1
NETLABEL21: *1.94 *.25 | length 125.8
  Top Layer w0.4: *.25 80.645,73.914 83.947,70.612 83.947,47.117 84.897,46.167 97.343,46.167 98.933,44.577 v1(98.933,36.068) ; v1(138.557,35.306) 138.557,37.592 143.637,42.672 143.637,50.419 v1@143.002,51.054
  Bottom Layer w0.4: v1(98.933,36.068) 102.616,32.385 135.636,32.385 v1(138.557,35.306) ; v1(143.002,51.308) 154.375,51.308 v1(154.432,51.251)
NETLABEL22: *1.13 *.12 | length 145.6
  Top Layer w0.4: *1.13 109.758,82.329 114.714,82.329 115.951,83.566 115.951,95.504 v1(117.856,97.409) ; v1(129.413,112.395) 129.413,97.536 v1(129.54,97.409)
  Bottom Layer w0.4: *.12 75.692,70.104 75.692,109.366 78.667,112.341 129.359,112.341 v1(129.413,112.395) ; v1(117.856,97.409) v1(129.54,97.409)
NETLABEL24: *1.22 *.16 | length 92
  Top Layer w0.4: *.16 78.232,57.404 80.118,57.404 80.899,56.623 80.899,36.957 84.389,33.467 102.682,33.467 106.758,37.543 106.758,43.678 107.33,44.25 114.028,44.25 115.398,45.62 115.398,60.243 114.666,60.975 114.666,61.678 114.107,62.237 109.758,62.237 *1.22
NETLABEL27: *1.46 *.19 | length 95.6
  Top Layer w0.4: *.19 80.645,58.674 81.661,57.658 81.661,38.227 83.947,35.941 88.36,35.941 89.503,34.798 100.457,34.798 105.029,39.37 105.029,52.451 106.907,54.329 114.107,54.329 114.662,54.883 114.666,54.879 114.666,59.678 114.107,60.237 107.276,60.237 106.426,61.087 106.426,63.627 107.128,64.329 111.758,64.329 *1.46
PA1: *1.16 *10.2 | length 32.8
  Top Layer w0.508: v1(115.951,75.438) 138.938,75.438 139.954,74.422 *10.2
  Bottom Layer w0.508: v1(108.712,75.283) 115.796,75.283 v1(115.951,75.438)
PA4: *1.48 *5.3 *6.2 *15.3 *16.2 | length 36.5
  Top Layer w0.508: *1.48 114.867,69.283 116.586,67.564 *16.2 ; *15.3 121.031,50.546 119.822,49.337 *6.2 116.205,49.972 116.205,61.043 115.478,61.77 115.478,63.342 *16.2 ; *5.3 121.158,65.532 120.076,64.45 *16.2
VCC: 7.1 8.1 9.1 10.1 11.1 12.1 13.1 14.1 15.1 16.1 17.1 18.1 19.1 20.1 21.1 22.1 23.1 24.1 25.1 26.1 27.1 *1.17 *1.33 *1.50 *5.7 *7.1 *9.7 *15.7 *.13 *.17 pp9.2 pp9.3 VR.1 | length 344.3
  Top Layer w0.508: *.17 75.184,57.912 75.184,64.516 *.13 ; *1.33 108.712,36.703 109.789,35.626 22.1 20.1 21.1 24.1 23.1 122.108,37.018 14.1 ; *1.17 *1.50 125.533,73.283 19.1 ; 15.1 122.174,43.241 15.1@122.301,43.241 ; 14.1@122.301,40.894 15.1@122.301,43.241 ; *15.7 15.1@122.301,43.241 ; v1(122.428,55.819) 13.1@122.428,58.42 ; *5.7 13.1@122.428,58.42 ; 27.1 19.1 ; 10.1 122.621,58.227 13.1@122.428,58.42 ; v1(125.984,47.625) 125.984,45.466 124.587,44.069 11.1 15.1@122.301,43.241 ; 9.1 16.1 135.067,64.389 ; *7.1 131.765,60.391 133.665,62.291 8.1 133.665,62.987 135.067,64.389 ; 19.1 128.59,73.213 130.363,71.44 7.1 17.1 18.1 137.287,70.485 138.684,69.088 *9.7 138.684,65.278 137.795,64.389 135.067,64.389
  Top Layer w0.8: pp9.3 pp9.2
  Bottom Layer w0.508: v1(122.428,55.819) 122.428,51.181 v1(125.984,47.625) ; v1(131.318,65.532) 132.08,66.294 v1(132.08,71.501)
  Bottom Layer w0.8: *.13 74.168,69.088 74.168,110.871 79.502,116.205 129.667,116.205 131.953,113.919 v1(131.953,111.379) v1(134.874,111.379) 160.528,111.379 163.83,108.077 163.83,41.91 164.846,40.894 164.846,37.338 164.211,36.703 pp9.2
VCC5: *1.66 *1.67 VR.3 | length 49.5
  Top Layer w0.508: *1.66 114.935,105.283 116.967,103.251 v1(116.967,102.235) ; v1(135.636,102.235) VR.3 ; v1(150.368,102.362) 150.368,104.394 151.225,105.251 *1.67 *1.67@154.4,105.283
  Bottom Layer w0.508: v1(116.967,102.235) 150.241,102.235 v1(150.368,102.362)
pads on no net: *1.2 *1.3 *1.4 *1.5 *1.6 *1.10 *1.11 *1.12 *1.14 *1.15 *1.19 *1.20 *1.21 *1.23 *1.24 *1.27 *1.32 *1.35 *1.41 *1.44 *1.45 *1.47 *1.51 *1.52 *1.53 *1.54 *1.55 *1.56 *1.57 *1.58 *1.62 *1.63 *1.64 *1.65 *1.68 *1.69 *1.70 *1.71 *1.72 *1.73 *1.74 *1.75 *1.76 *1.77 *1.79 *1.81 *1.82 *1.83 *1.85 *1.86 *1.87 *1.88 *1.89 *1.90 *1.91 *1.92 *1.95 *1.97 *1.98 *1.100 *1.101 *1.104 *1.106 *1.107 *1.108 *1.109 *1.110 *1.111 *1.112 *1.113 *1.114 *1.116 *1.117 *1.118 *1.119 *1.124 *1.125 *1.126 *1.127 *1.128 *1.130 *1.131 *5.1 *5.5 *5.8 *9.1 *9.5 *9.8 *15.1 *15.5 *15.8 *.1 *.14 *.15 *.20 *.21 *.22 *.23 pp9.5

## Polygon pours and split planes (outlines as drawn)
GND on Bottom Layer "Bottom Layer-No Net" (solid, pour order 8): 80.645,119.507 80.645,119.253 71.882,110.49 71.755,110.363 71.755,36.068 80.264,27.559 165.989,27.559 165.989,110.998 157.48,119.507
GND on Top Layer "Bottom Layer-No Net" (solid, pour order 10): 157.48,119.507 165.989,110.998 165.989,27.559 80.264,27.559 71.755,36.068 71.755,110.363 71.755,110.617 80.645,119.507

## Silkscreen, mask and mechanical layers (free items; w line width, h text height)
Top Overlay:
  text "D0" at 83.058,113.411 h0.52
  text "D15" at 83.058,75.311 h0.52
  text "A0" at 83.058,72.517 h0.52
  text "D9" at 83.058,49.657 h0.52
  text "NL" at 82.677,47.244 h0.52
  text "NE1" at 82.677,44.704 h0.52
  text "NWE" at 82.677,42.037 h0.52
  text "NOE" at 82.677,39.497 h0.52
  text "CLK" at 82.677,36.957 h0.52
  text "GND" at 82.677,34.417 h0.52
  text "2016-3-26_TFT_FFT->IFFT_AUDIO" at 80.772,30.988 h1.52
Mechanical 1:
  circle w0.254: c163.068,116.332 r1.524
  circle w0.254: c74.93,30.48 r1.524
  circle w0.254: c75.057,116.205 r1.524
  lines w0.508: 71.501,27.305 71.501,119.761 166.243,119.761 166.243,27.305 71.501,27.305